# Altium PCB HeadTracker.PcbDoc
Units mm, origin at the board's own origin, x right, y up, seen from the top; angles counter-clockwise.
Board outline 138.6 x 120 mm, 2 copper layers (Top Layer, Bottom Layer), stack 1.671 mm thick; 33 components, 22 nets, 96 pads, 0 vias.
Unrouted connection lines stored in the file: 16.
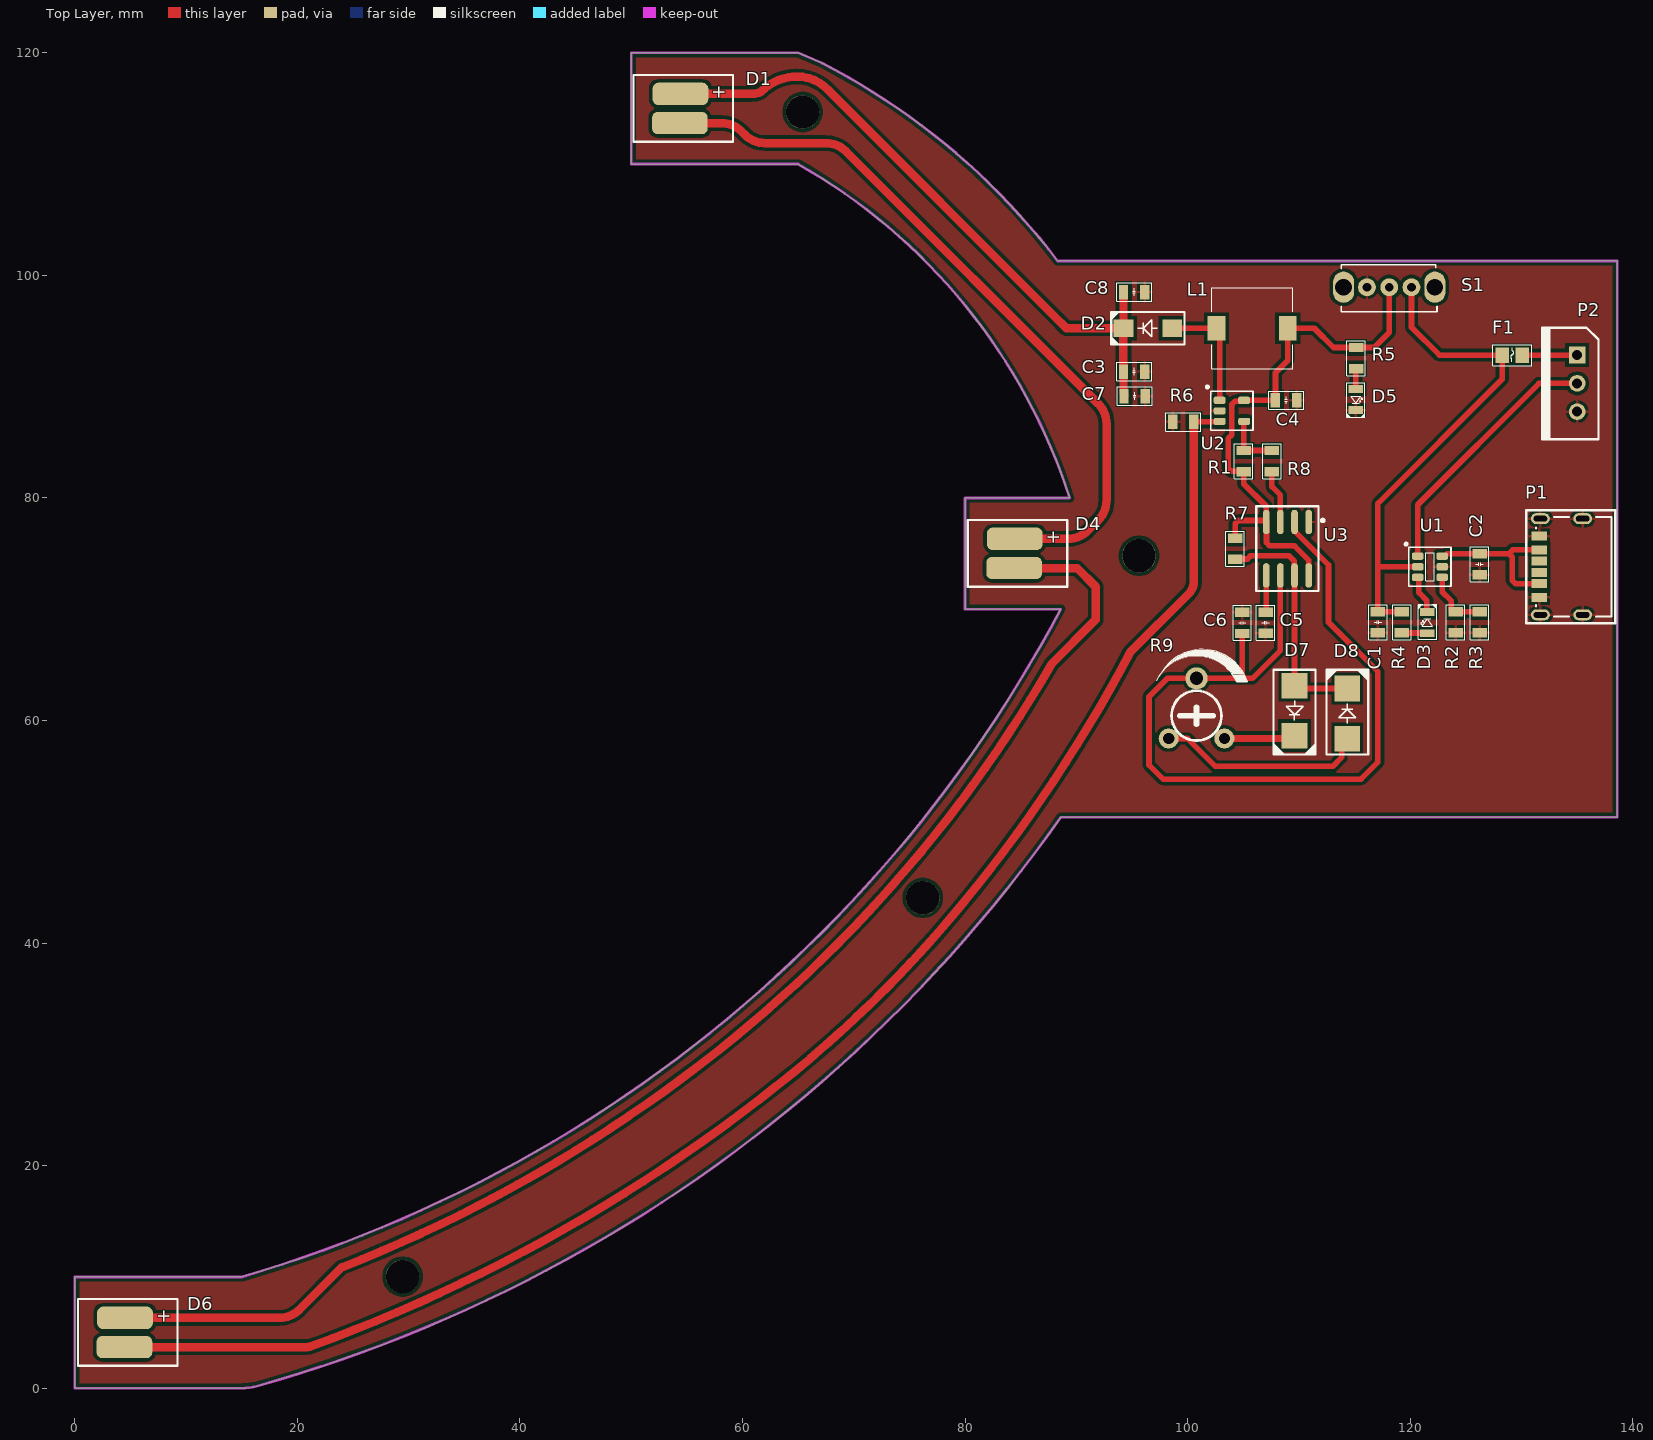
[diagram p0: Top Layer view]
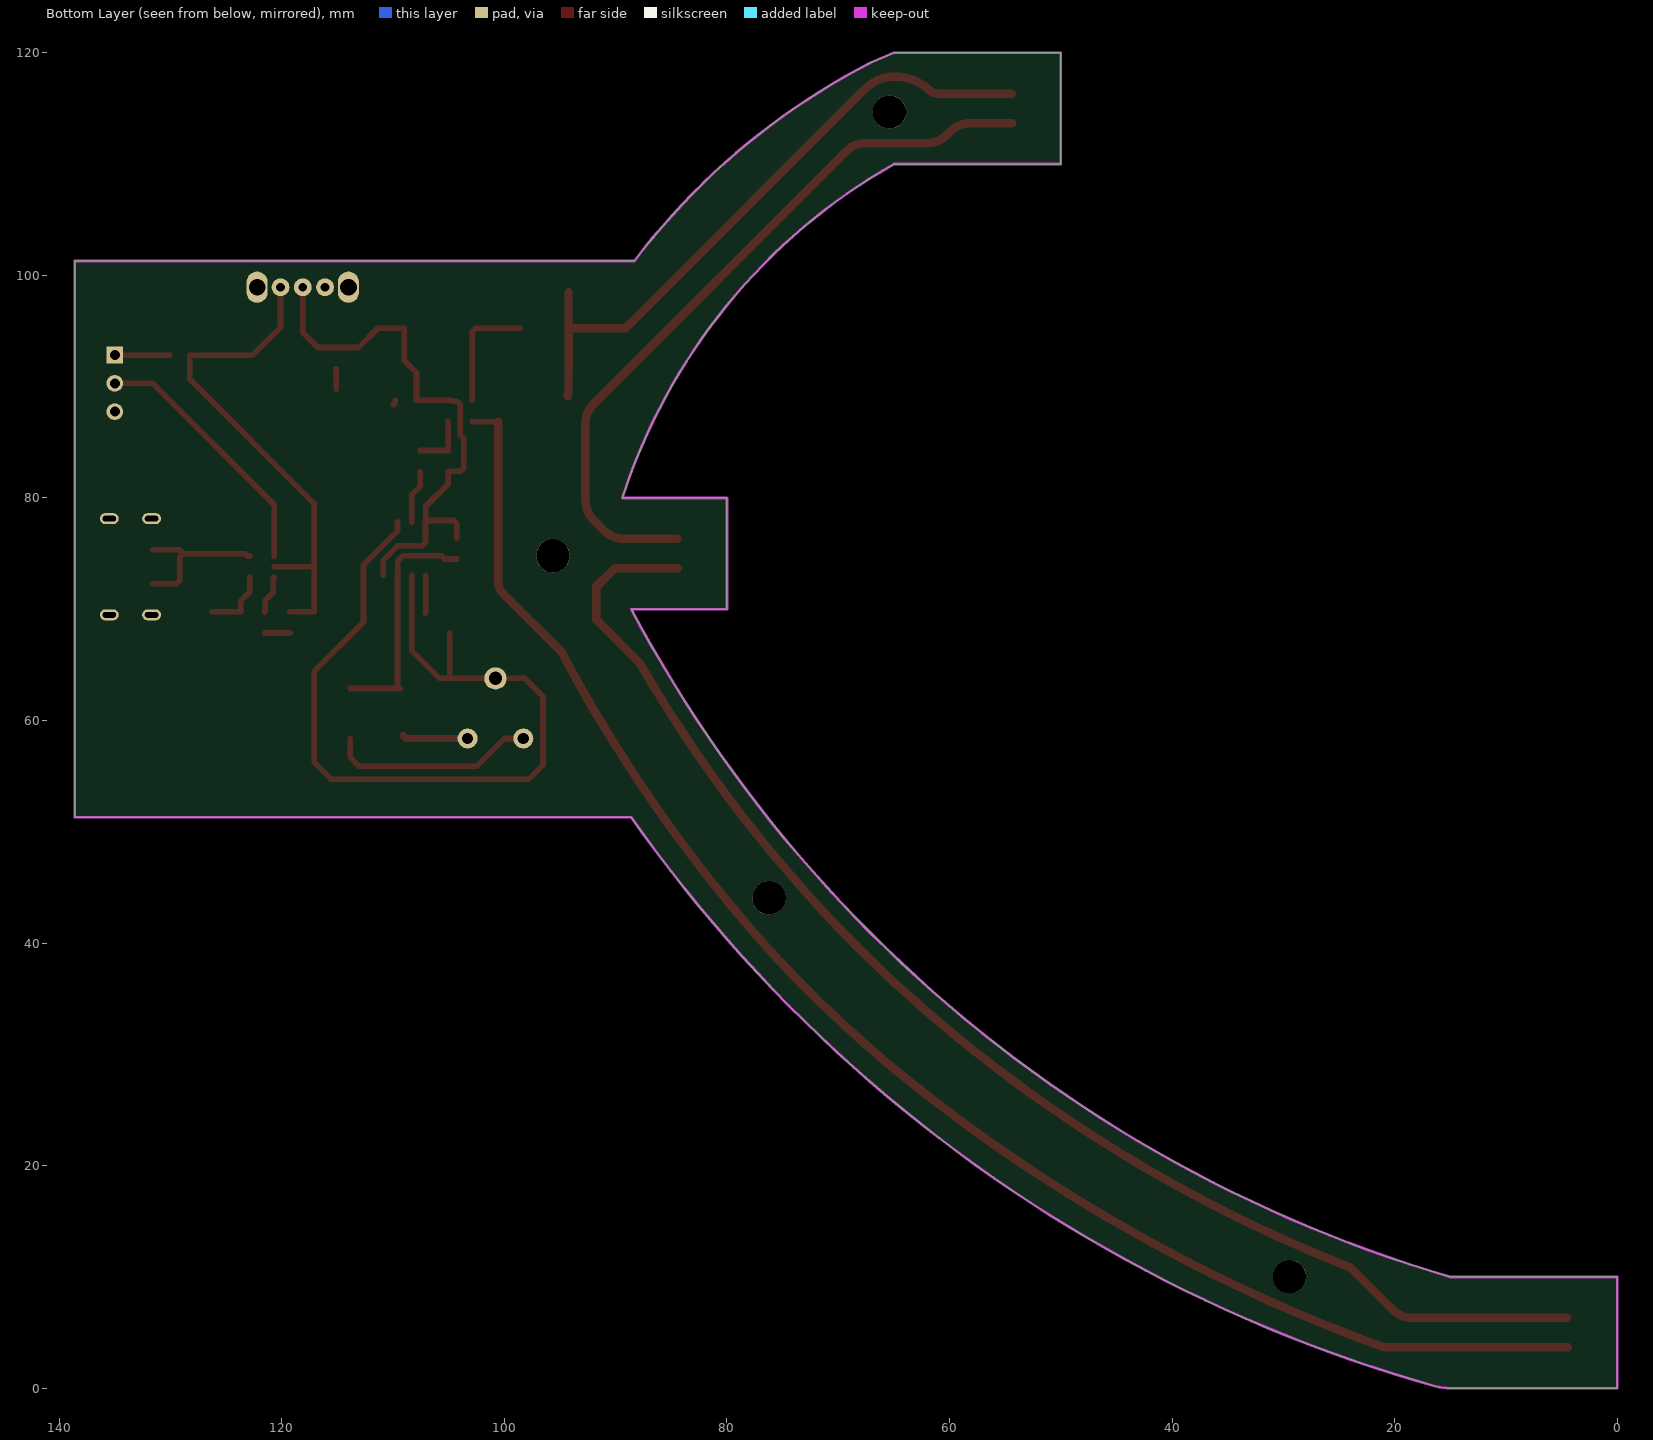
[diagram p1: Bottom Layer view, seen from below]
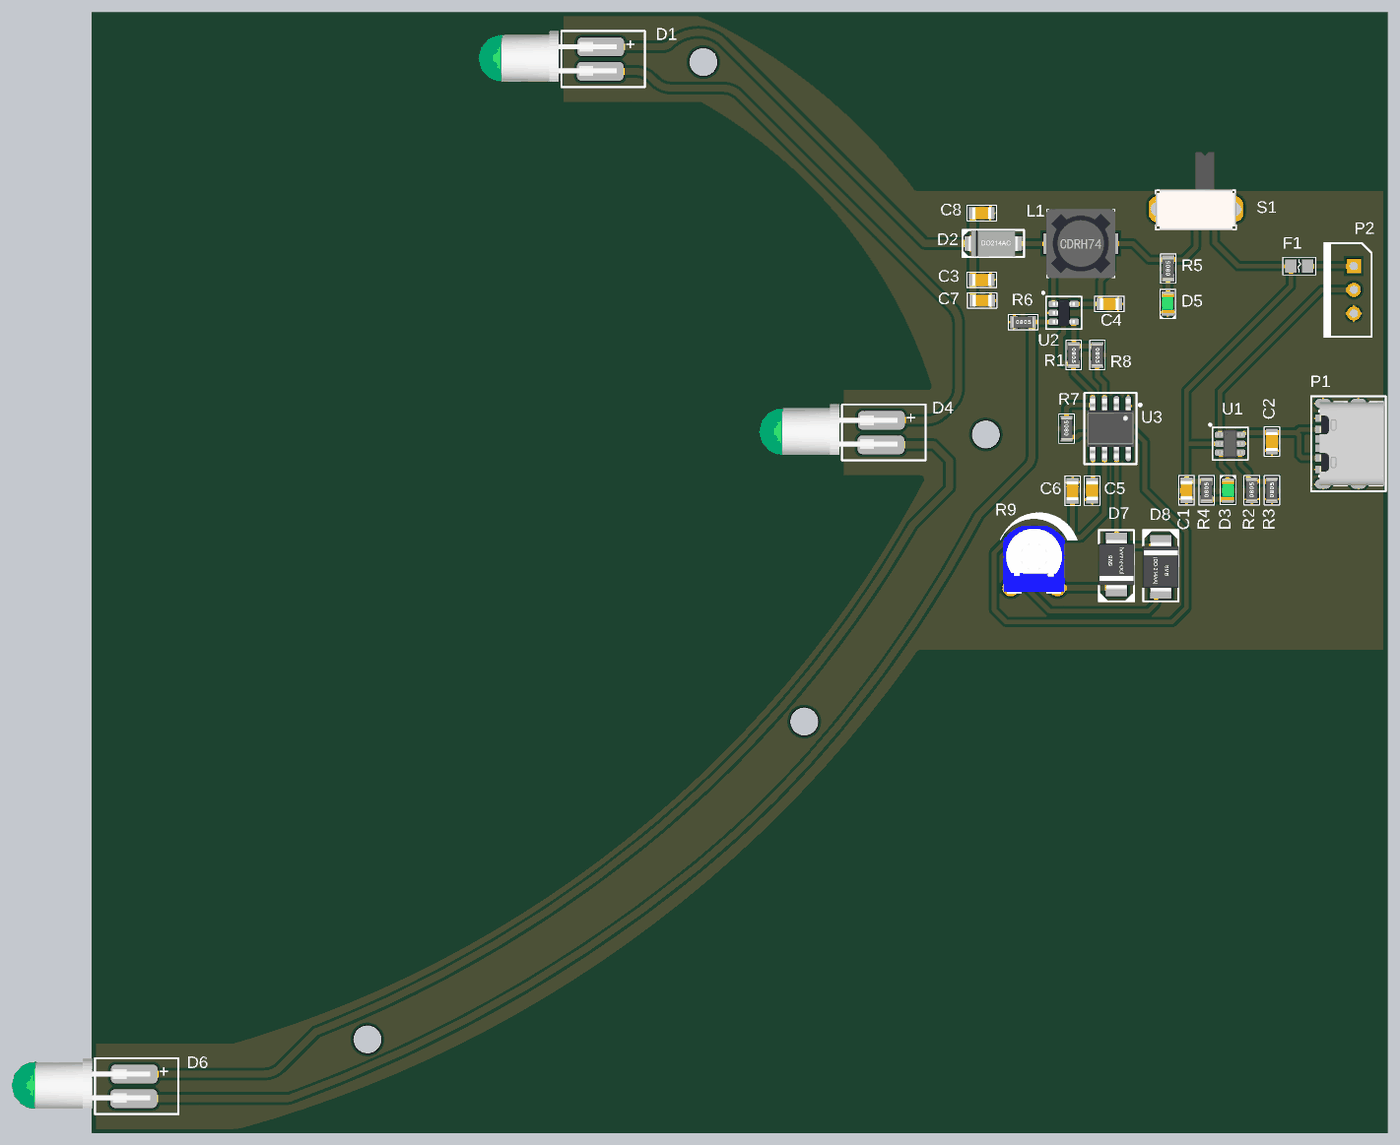
[diagram p2: 3D render of the assembled board from above, using the file's embedded part models]

## Layer stack, top to bottom
Top Solder: solder mask 0.0102, Solder Resist, Dk 3.5
Top Layer: signal copper 0.0356
Dielectric 1: dielectric 1.6, FR-4, Dk 4.8
Bottom Layer: signal copper 0.0356
Bottom Solder: solder mask 0.0102, Solder Resist, Dk 3.5

## Board outline
0,0 15,0 ccw(c15,5) 16.352,0.186 ccw(c-19.347,127.252) 88.597,51.302 138.597,51.302 138.597,101.302 88.306,101.302 ccw(c38.663,63.664) 67.1,119.093 65,120 50,120 50,110 65,110 cw(c38.663,63.664) 89.396,80 80,80 80,70 88.588,70 cw(c-19.347,127.252) 15,10 0,10

## Design rules (kind name [scope] priority, off if disabled: settings)
Clearance [All] p1: gap=0.305 ignorepadtopadclearanceinfootprint=TRUE
PolygonConnect [All] p1: connectstyle=Relief reliefconductorwidth=0.254 reliefentries=4 polygonreliefangle="90 Angle" airgapwidth=0.254
RoutingVias [All] p1: holewidth=0.711 width=1.27 viastyle="Through Hole" minholewidth=0.711 minwidth=1.27 maxholewidth=0.711 maxwidth=1.27
SolderMaskExpansion [All] p1: expansion=0.102 istentingtop=FALSE
Width [All] p1: maxlimit=0.762 minlimit=0.305 preferedwidth=0.508
30 further rules are at their usual default settings.

## Components (designator, comment, footprint, x,y, rotation, side; value= is the part's Value field where it differs from the comment)
C1 "4.7uF 10V" CAP0805 117.094,68.834 r90 top value=4.7uF
C2 "4.7uF 16V" CAP0805 126.238,74.041 r90 top value=4.7uF
C3 "100nF 50V" CAP0805 95.183,91.359 r180 top value=100nF
C4 "4.7uF 10V" CAP0805 108.839,88.773 r180 top value=4.7uF
C5 "1nF 10V" CAP0805 106.997,68.797 r90 top value=1nF
C6 "100nF 10V" CAP0805 104.902,68.768 r270 top value=100nF
C7 "100nF 50V" CAP0805 95.229,89.148 r0 top value=100nF
C8 "100nF 50V" CAP0805 95.183,98.503 r0 top value=100nF
D1 "White LED" "LED_5mm - Right2" 53.848,114.935 r270 top
D2 "PMEG4010CEGWJ" "DO-214-AC (SMA)" 96.421,95.25 r180 top
D3 "Red LED" LED_0805 121.539,68.859 r90 top
D4 "White LED" "LED_5mm - Right2" 83.88,74.952 r270 top
D5 "Green LED" LED_0805 115.099,88.779 r270 top
D6 "White LED" "LED_5mm - Right2" 3.937,4.953 r270 top
D7 "1N4007" "DO-214-AA (SMB)" 109.601,60.96 r270 top
D8 "1N4007" "DO-214-AA (SMB)" 114.343,60.554 r90 top
F1 "xA" Fuse_0805 129.159,92.837 r0 top
L1 "10uH" CDRH74 105.791,95.25 r90 top
P1 "USB Connector" "USB TYPE-C 6P(073)" 133.542,73.817 r90 top
P2 "Pin Gerd 3" "Pin Gerd S 3" 135.001,92.837 r270 top
R1 "1K  5%  1W" RES0805 105.029,83.312 r270 top value=1K
R2 "5.1K  1%  1/10W" RES0805 124.079,68.834 r90 top value=5.1K
R3 "5.1K  1%  1/10W" RES0805 126.238,68.834 r90 top value=5.1K
R4 "1K  5%  1W" RES0805 119.253,68.834 r90 top value=1K
R5 "1K  5%  1W" RES0805 115.135,92.568 r90 top value=1K
R6 "1K  5%  1W" RES0805 99.61,86.833 r0 top value=1K
R7 "1K  5%  1W" RES0805 104.266,75.438 r90 top value=1K
R8 "1K  5%  1W" RES0805 107.569,83.312 r270 top value=1K
R9 "1K" "POT 1" 98.296,58.383 r0 top
S1 "(Switch) SPDT_Subminiator" "SPDT Subminiator" 118.11,98.933 r0 top
U1 "BQ21040" SOT23-6 121.768,73.817 r0 top
U2 "TPS61169" SOT23-5 102.87,88.773 r0 top
U3 "LM555CM" "SOIC 8-3.9mm" 108.966,75.438 r270 top

## Footprints (in the part's own frame and the unit in brackets; to place one, negate y for a bottom-side part, rotate by r counter-clockwise, add the part's x,y. Pads: shape width x height; smd on the part's side, far side on the other; paste and mask are expansions set on the pad)
CAP0805 [mm] "Chip Capacitor, 2-Leads, Body 2/00x1/25mm, IPC Medium Density DESIGNER:ABBAS BASEREH"
  rect 0.85x1.3 smd: 1(-0.95,0) 2(0.95,0)
  silkscreen extent -1.58,-0.82 1.58,0.82, body extent -1.02,-0.65 1.02,0.65, height 0.5
CDRH74 [mm]
  rect 2.2x1.6 smd: 1(0,-3.2) 2(0,3.2)
  silkscreen extent -3.65,-3.65 3.65,3.65, body extent -3.7,-3.7 3.7,3.7
"DO-214-AA (SMB)" [mm] "DO-214-AA/SMB; 2 C-Bend Leads; Body 5.3 x 3.6 mm, inc. leads (LxW)"
  rect 2.3x2.3 smd: 1(-2.177,0) 2(2.323,0)
  silkscreen extent -3.61,-1.88 4.01,1.88, body extent -2.68,-1.95 2.82,1.95, height 2.45
"DO-214-AC (SMA)" [mm]
  rect 1.778x1.55 smd: 1(-2.189,0) 2(2.189,0)
  silkscreen extent -3.29,-1.45 3.29,1.45, body extent -2.73,-1.4 2.76,1.4, height 2.29
Fuse_0805 [mm]
  rect 1.2x1.4 smd: 1(-0.9,0) 2(0.9,0)
  silkscreen extent -1.75,-0.95 1.75,0.95, body extent -1.07,-0.7 1.07,0.7, height 0.7
"LED_5mm - Right2" [mm]
  rrect50% 2x5 smd: 1(-1.375,0.575) 2(1.25,0.525)
  silkscreen extent -3.08,-3.64 2.93,5.3, body extent -3.08,-12.53 2.35,2.27, height 3.31
LED_0805 [mm]
  rect 0.7x1.3 smd: 1(-1.016,0) 2(0.889,0)
  silkscreen extent -1.58,-0.82 1.58,0.82, body extent -1.07,-0.63 0.97,0.64, height 1.1
"Pin Gerd S 3" [mm] "Stright"
  rect 1.5x1.5 hole 0.9: 1(0,0)
  round 1.5 hole 0.9: 2(2.54,0) 3(5.08,0)
  silkscreen extent -2.46,-3.15 7.57,1.91
"POT 1" [mm] "Trimmer"
  round 1.8 hole 1: 1(0,0) 2(5,0)
  round 2 hole 1.2: 3(2.5,5.4)
  silkscreen extent -1.1,-0.19 7.09,8.02, body extent -0.76,-0.64 5.74,6.6, height 8.7
RES0805 [mm] "Chip Resistor, 2-Leads, Body 2/00x1/25mm, IPC Medium Density DESIGNER:ABBAS BASEREH"
  rect 0.85x1.3 smd: 1(-0.95,0) 2(0.95,0)
  silkscreen extent -1.58,-0.82 1.58,0.82, body extent -1.25,-0.62 1.25,0.62, height 0.79
"SOIC 8-3.9mm" [mm] "SOIC, 8-Leads, Body 4.9x3.9mm, Pitch 1.27mm, IPC Medium Density"
  oval 2.2x0.6 smd: 1(-2.4,1.905) 2(-2.4,0.635) 3(-2.4,-0.635) 4(-2.4,-1.905) 5(2.4,-1.905) 6(2.4,-0.635) 7(2.4,0.635) 8(2.4,1.905)
  silkscreen extent -3.81,-2.79 3.81,3.3, body extent -3.17,-2.51 3.17,2.49, height 1.88
SOT23-5 [mm]
  rrect50% 1.06x0.65 smd: 1(0,0) 2(0,-0.95) 3(0,-1.9) 4(2.2,-1.9) 5(2.2,0)
  silkscreen extent -1.2,-2.7 3,1.3, body extent -0.07,-2.41 2.27,0.51, height 1
SOT23-6 [mm]
  rrect50% 1.06x0.65 smd: 1(-1.1,0.95) 2(-1.1,0) 3(-1.1,-0.95) 4(1.1,-0.95) 5(1.1,0) 6(1.1,0.95)
  silkscreen extent -2.23,-1.75 1.9,2.13, body extent -1.35,-1.5 1.35,1.5, height 1.03
"SPDT Subminiator" [mm] "Subminiator SPDT switch"
  round 1.6 hole 0.8: 1(2,0) 2(0,0) 3(-2,0)
  oval 1.9x2.8 hole 1.5: M2(-4.1,0) M2(4.1,0)
  silkscreen extent -4.3,-2.2 4.3,-1.7, body extent -4.31,-2.28 4.3,6.09, height 4.7
"USB TYPE-C 6P(073)" [mm] "SHOUHAN Right Angle 6P Female Type-C SMD USB Connectors"
  oval 1x1.7 hole 0.5 slot 1.2 at 90 deg paste+0 mask+0.051: 0(-4.32,-1.951) 0(-4.32,1.849) 0(4.32,-1.951) 0(4.32,1.849)
  rect 0.8x1.4 smd paste-100 mask+0.051: A5(-0.5,1.947) A9(1.52,1.948) A12(2.75,1.949) B5(0.5,1.947) B9(-1.52,1.951) B12(-2.75,1.949)
  silkscreen extent -5.08,-4.88 5.08,3.12, body extent -4.47,-4.59 4.47,2.21, height 3.46

## Part data
C1 C4 C5 C6: library part "Capacitor Ceramic - SMD", "Multilayer Ceramic Capacitors MLCC - SMD/SMT", Temperature Range="-55°C ~ 125 °C", Tolerance="X7R 10%", Voltage_Rating=10V
  C1 C4: Specification="Multilayer Ceramic Capacitors MLCC - SMD/SMT 4.7uF  X7R 10%  10V"
  C5: Specification="Multilayer Ceramic Capacitors MLCC - SMD/SMT 1nF  X7R 10%  10V"
  C6: Specification="Multilayer Ceramic Capacitors MLCC - SMD/SMT 100nF  X7R 10%  10V"
C2: library part "Capacitor Ceramic - SMD", "Multilayer Ceramic Capacitors MLCC - SMD/SMT", Temperature Range="-55°C ~ 125 °C", Tolerance="X7R 10%", Voltage_Rating=16V, Specification="Multilayer Ceramic Capacitors MLCC - SMD/SMT 4.7uF  X7R 10%  16V"
C3 C7 C8: library part "Capacitor Ceramic - SMD", "Multilayer Ceramic Capacitors MLCC - SMD/SMT", Temperature Range="-55°C ~ 125 °C", Tolerance="X7R 10%", Voltage_Rating=50V, Specification="Multilayer Ceramic Capacitors MLCC - SMD/SMT 100nF  X7R 10%  50V"
D1 D4 D6: library part "LED White", "Typical LED", Temperature Range="-40°C to 150°C", Pacakge="3528 SMD", Specification="White LED"
D2: library part "Diode Schottky", "Schottky Rectifiers", Temperature Range="-x°C to x°C", PartNumber=PMEG4010CEGWJ
D3: library part "LED Red", "Typical LED", Temperature Range="-40°C to 150°C", Pacakge="3528 SMD", Specification="Red LED"
D5: library part "LED Green", "Typical LED", Temperature Range="-40°C to 150°C", Pacakge="3528 SMD", Specification="Green LED"
D7 D8: library part Diode, "Generic Diode", Temperature Range="-x°C to x°C", PartNumber=1N4007
F1: library part Fuse, "Fuses 5x20 with holdeer pins", Temperature Range="-40°C to 150°C", Tolerance=?%, Pacakge=0603, Specification=-
L1: library part Inductor, "Inductor", Temperature Range="-40°C to 150°C", Tolerance=?%, Pacakge=0603, Specification=-
P1: library part "USB C 6P", "USB Connector Type A", Max Current=600mA, Category=Connector, ComponentLink1Description=Datasheet, ComponentLink2Description=Reference, Designer="ABBAS BASEREH", Mounting Technology="Surface Mount\Through-Hole", Pin Count=4-6, Publisher="ABBAS BASEREH", Status=Unreleased, Update=1395-11-17
P2: "Stright"
R1 R4 R5 R6 R7 R8: library part "Resistor Thick Film - SMD", "Thick Film Resistor SMD", Power=1W, Temperature Range="-55°C ~ 155 °C", Tolerance=5%, Specification="Tick Film Resistor 1K 5% 1W", Type="Thick Film"
R2 R3: library part "Resistor Thick Film - SMD", "Thick Film Resistor SMD", Power=1/10W, Temperature Range="-55°C ~ 155 °C", Tolerance=1%, Specification="Tick Film Resistor 5.1K 1% 1/10W", Type="Thick Film"
R9: library part Potentiometer, "Potentiometer", Temperature Range="-40°C to 150°C", Tolerance=?%, Pacakge=0603, Specification=-
S1: "Subminiator SPDT Switch", Company=E.P.I.L, Design date=2011/11/02
U1: "bq21040 0.8-A, Single-Input, Single Cell Li-Ion and Li-Pol Battery Charger", Package=SOT23-6, Temperature Range="-40°C to 125°C", PartNumber=BQ21040, SMD Code=130E, Specification="BQ21040 0.8-A, Single-Input, Single Cell Li-Ion and Li-Pol Battery Charger"
U2: "TPS61169 38V High Current-Boost WLED Driver With PWM Control", Package=SOT23-5, Temperature Range="-40°C to 85°C", PartNumber=TPS61169, SMD Code=SZL, Specification="TPS61169 38V High Current-Boost WLED Driver With PWM Control"
U3: "Timer, 8-pin Narrow SOIC", Temperature Range="-x°C to x°C", PartNumber=LM555CM

## Free pads (board coordinates)
  round 3 hole 3 unplated: 2(29.464,10.033) 2(65.405,114.681) 2(76.2,44.069) 2(95.631,74.803)

## Nets (pads, with @x,y where several pads share a name; then routed paths per layer and width w, separated by ;. In a path a pad name is that pad's centre, name@x,y a point inside that pad or via, vN(x,y) a via of type N, cw(c..) or ccw(c..) an arc to the next point about the centre after c; other vN are vias at no path point)
GND: C1.1 C2.1 C3.1 C4.1 C5.1 C6.1 C7.2 C8.2 D5.2 P1.0 P1.A12 P1.B12 P2.3 R2.1 R3.1 R6.1 S1.3 U1.5 U2.2 U3.1 | length 0.5
  Top Layer w0.508: C4.1 109.789,88.548 C4.1@109.96,88.377
NetC1_2: C1.2 F1.1 R4.2 S1.1 U1.2 | length 46.2
  Top Layer w0.508: R4.2 C1.2 117.094,73.817 ; S1.1 120.11,95.341 122.614,92.837 F1.1 128.259,90.667 117.094,79.502 117.094,73.817 ; U1.2 117.094,73.817
NetC2_2: C2.2 P1.A9 P1.B9 U1.6 | length 14
  Top Layer w0.508: U1.6 123.073,74.767 123.297,74.991 C2.2 128.861,74.991 ; P1.B9 129.457,72.297 129.159,72.595 129.159,74.693 128.861,74.991 ; P1.A9 129.207,75.337 128.861,74.991
NetC3_2: C3.2 C7.1 C8.1 D1.1 D2.2 | length 62.7
  Top Layer w0.762: D1.1 56.423,116.31 60.867,116.31 ccw(c60.867,118.162) 61.486,116.416 ccw(c61.229,117.134) 61.758,116.585 cw(c64.917,113.332) 64.81,117.865 cw(c64.9,114.035) 67.61,116.744 67.613,116.741 88.049,96.304 89.104,95.25 D2.2 ; C3.2@94.232,91.36 D2.2 ; C8.1 C3.2 94.233,89.42 94.279,89.373 C7.1
NetC5_2: C5.2 U3.5 | length 3.4
  Top Layer w0.508: U3.5 107.072,73.027 107.072,69.668 C5.2@107.084,69.657
NetC6_2: C6.2 R9.3 U3.2 U3.6 | length 76.9
  Top Layer w0.508: C6.2 104.902,63.91 105.029,63.783 ; U3.6 108.331,66.294 105.82,63.783 105.029,63.783 ; U3.2 109.601,77.038 112.649,73.99 112.649,68.834 117.094,64.389 117.094,56.261 115.57,54.737 97.79,54.737 96.52,56.007 96.52,62.136 98.167,63.783 R9.3 105.029,63.783
NetD1_2: D1.2 D4.1 | length 66.7
  Top Layer w0.762: D1.2 58.11,113.685 cw(c58.11,111.145) 59.906,112.941 60.216,112.631 ccw(c62.012,114.427) 62.012,111.887 67.492,111.887 cw(c67.492,109.347) 69.288,111.143 91.966,88.465 cw(c90.17,86.669) 92.71,86.669 92.71,79.792 cw(c90.17,79.792) 91.966,77.996 91.041,77.071 cw(c89.245,78.867) 89.245,76.327 D4.1
NetD2_1: D2.1 L1.2 U2.1 | length 10.6
  Top Layer w0.508: D2.1 L1.2 102.87,94.971 U2.1
NetD3_1: D3.1 R4.1 | length 2.3
  Top Layer w0.508: R4.1 119.274,67.863 121.519,67.863 D3.1
NetD3_2: D3.2 U1.3 | length 3.5
  Top Layer w0.508: U1.3 120.706,72.867 120.777,72.796 120.777,71.501 121.487,70.791 121.487,69.844 121.539,69.792 D3.2
NetD4_2: D4.2 D6.1 | length 123.2
  Top Layer w0.762: D6.1 18.396,6.328 ccw(c18.396,8.868) 20.192,7.072 23.978,10.858 ccw(c-24.244,133.698) 59.148,31.42 ccw(c-17.898,125.915) 87.77,65.09 91.742,69.061 91.742,72.019 90.059,73.702 87.679,73.702 ; D4.2 87.679,73.702
NetD5_1: D5.1 R5.1 | length 1.8
  Top Layer w0.508: D5.1 115.117,89.813 115.117,91.6 R5.1
NetD6_2: D6.2 R6.2 U2.3 | length 140.9
  Top Layer w0.508: R6.2 100.58,86.853 102.85,86.853 U2.3
  Top Layer w0.762: D6.2 20.905,3.703 ccw(c20.903,4.465) 21.162,3.748 ccw(c-30.13,144.742) 64.68,28.461 ; 64.68,28.462 ccw(c-5.029,113.36) 80.016,43.829 ccw(c-25.049,129.733) 94.843,66.141 100.086,71.384 ccw(c98.94,72.529) 100.56,72.529 R6.2
NetD7_1: D7.1 D8.2 R7.1 U3.7 | length 21.3
  Top Layer w0.508: R7.1 104.292,74.515 105.376,74.515 105.664,74.803 109.093,74.803 109.587,74.309 109.587,73.052 U3.7 D7.1 ; D7.1@109.353,62.877 D8.2@113.835,62.877
NetD7_2: D7.2 R9.2 | length 5.9
  Top Layer w0.635: R9.2 108.839,58.383 D7.2@109.093,58.637
NetD8_1: D8.1 R9.1 | length 18.6
  Top Layer w0.508: R9.1 99.986,58.383 102.489,55.88 113.03,55.88 113.835,56.685 D8.1@113.835,58.377
NetF1_2: F1.2 P2.1 | length 4.9
  Top Layer w0.508: F1.2 P2.1
NetP2_2: P2.2 U1.1 | length 23.5
  Top Layer w0.508: U1.1 120.668,79.393 131.572,90.297 P2.2
NetR1_1: R1.1 R8.1 U2.4 | length 5.2
  Top Layer w0.508: U2.4 105.05,86.853 105.05,84.283 R1.1 R8.1
NetR2_2: R2.2 R3.2 U1.4 | length 6
  Top Layer w0.508: U1.4 122.868,71.569 123.698,70.739 123.698,69.784 R3.2
NetR8_2: R8.2 U3.3 | length 4.8
  Top Layer w0.508: R8.2 107.569,81.026 108.331,80.264 U3.3
VCC: C4.2 L1.1 R1.2 R5.2 R7.2 S1.2 U2.5 U3.4 U3.8 | length 49.9
  Top Layer w0.508: R7.2 104.266,77.68 104.563,77.978 107.019,77.978 107.061,78.02 107.061,79.248 105.029,81.28 R1.2 104.992,82.399 103.93,82.399 103.632,82.697 103.632,85.344 103.959,85.671 103.959,88.404 104.256,88.702 104.73,88.702 104.801,88.773 U2.5 C4.2 107.889,91.252 108.991,92.354 L1.1 111.379,95.25 113.111,93.518 R5.2 116.759,93.518 118.11,94.869 S1.2 ; U3.4 107.079,77.82 107.079,75.99 107.376,75.692 109.595,75.692 110.871,74.416 U3.8
pads on no net: P1.A5 P1.B5 S1.M2

## Polygon pours and split planes (outlines as drawn)
GND on Top Layer "GND_L01_P001" (solid, pour order 1): 0,0 15,0 ccw(c15,5) 16.352,0.186 ccw(c-19.347,127.252) 88.597,51.302 138.597,51.302 138.597,101.302 88.306,101.302 ccw(c38.663,63.664) 67.1,119.093 65,120 50,120 50,110 65,110 cw(c38.663,63.664) 89.396,80 80,80 80,70 88.588,70 cw(c-19.347,127.252) 15,10 0,10

## Keep-outs
Keep-Out Layer:
  the board outline again, w0.254

## Silkscreen, mask and mechanical layers (free items; w line width, h text height)
Top Overlay:
  lines w0.15: 113.792,100.584 113.792,100.965 122.301,100.965 122.301,100.711
Mechanical 15:
  circle w0.254: c121.793,68.707 r2.443
  circle w0.254: c115.099,88.779 r2.147
  lines w0.254: 0,0 0,10 15,10 ccw(c-19.347,127.252) 88.588,70 80,70 80,80 89.396,80 ccw(c38.663,63.664) 65,110 50,110 50,120 65,120 67.1,119.093 cw(c38.663,63.664) 88.306,101.302 138.597,101.302 138.597,51.302 88.597,51.302 cw(c-19.347,127.252) 16.352,0.186 cw(c15,5) 15,0 0,0

## Text inside footprints (layer, text, board x,y; h text height)
D1: Top Overlay "+" at 56.988,117.11 h2.03 r270
D4: Top Overlay "+" at 87.02,77.127 h2.03 r270
D6: Top Overlay "+" at 7.077,7.128 h2.03 r270